# Altium PCB XUF208_Breakout.PcbDoc
Units mil, origin at the board's own origin, x right, y up, seen from the top; angles counter-clockwise.
Board outline 1259.84 x 1909.45 mil, 4 copper layers (Top Layer, Ground Layer, Power Layer, Bottom Layer), stack 61.85 mil thick; 56 components, 63 nets, 257 pads, 130 vias.
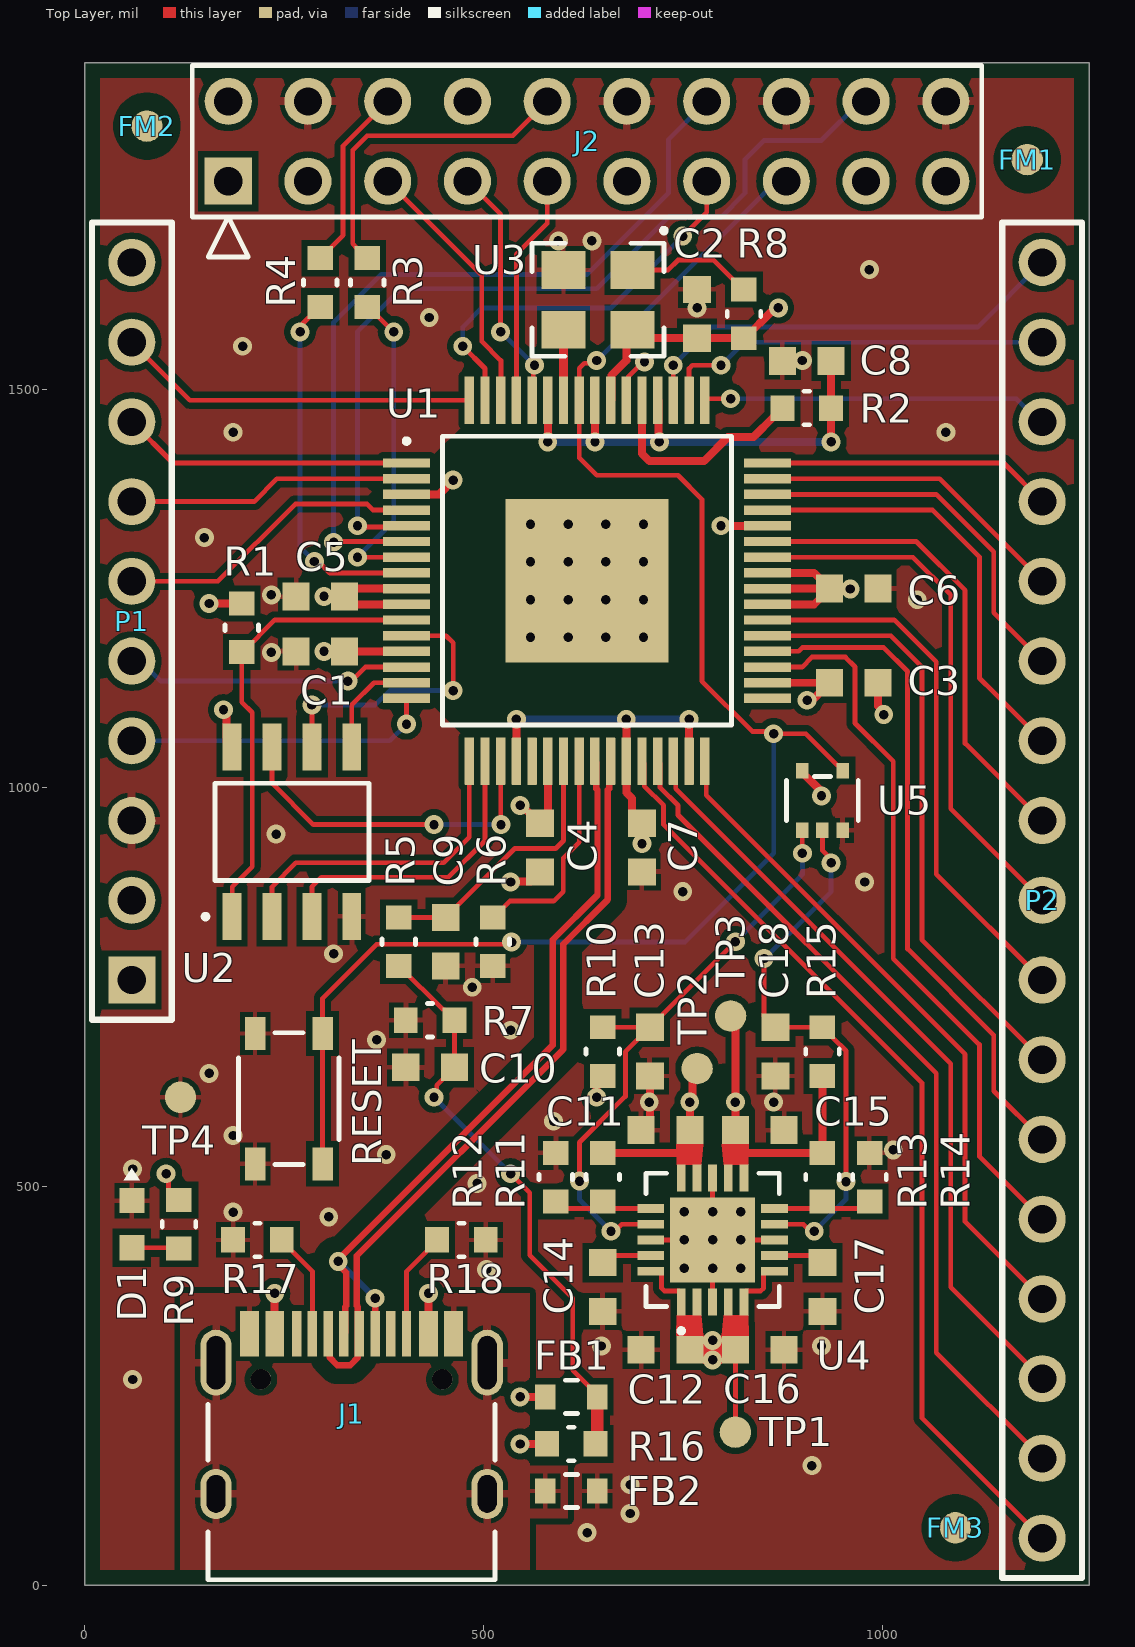
[diagram p0: Top Layer view]
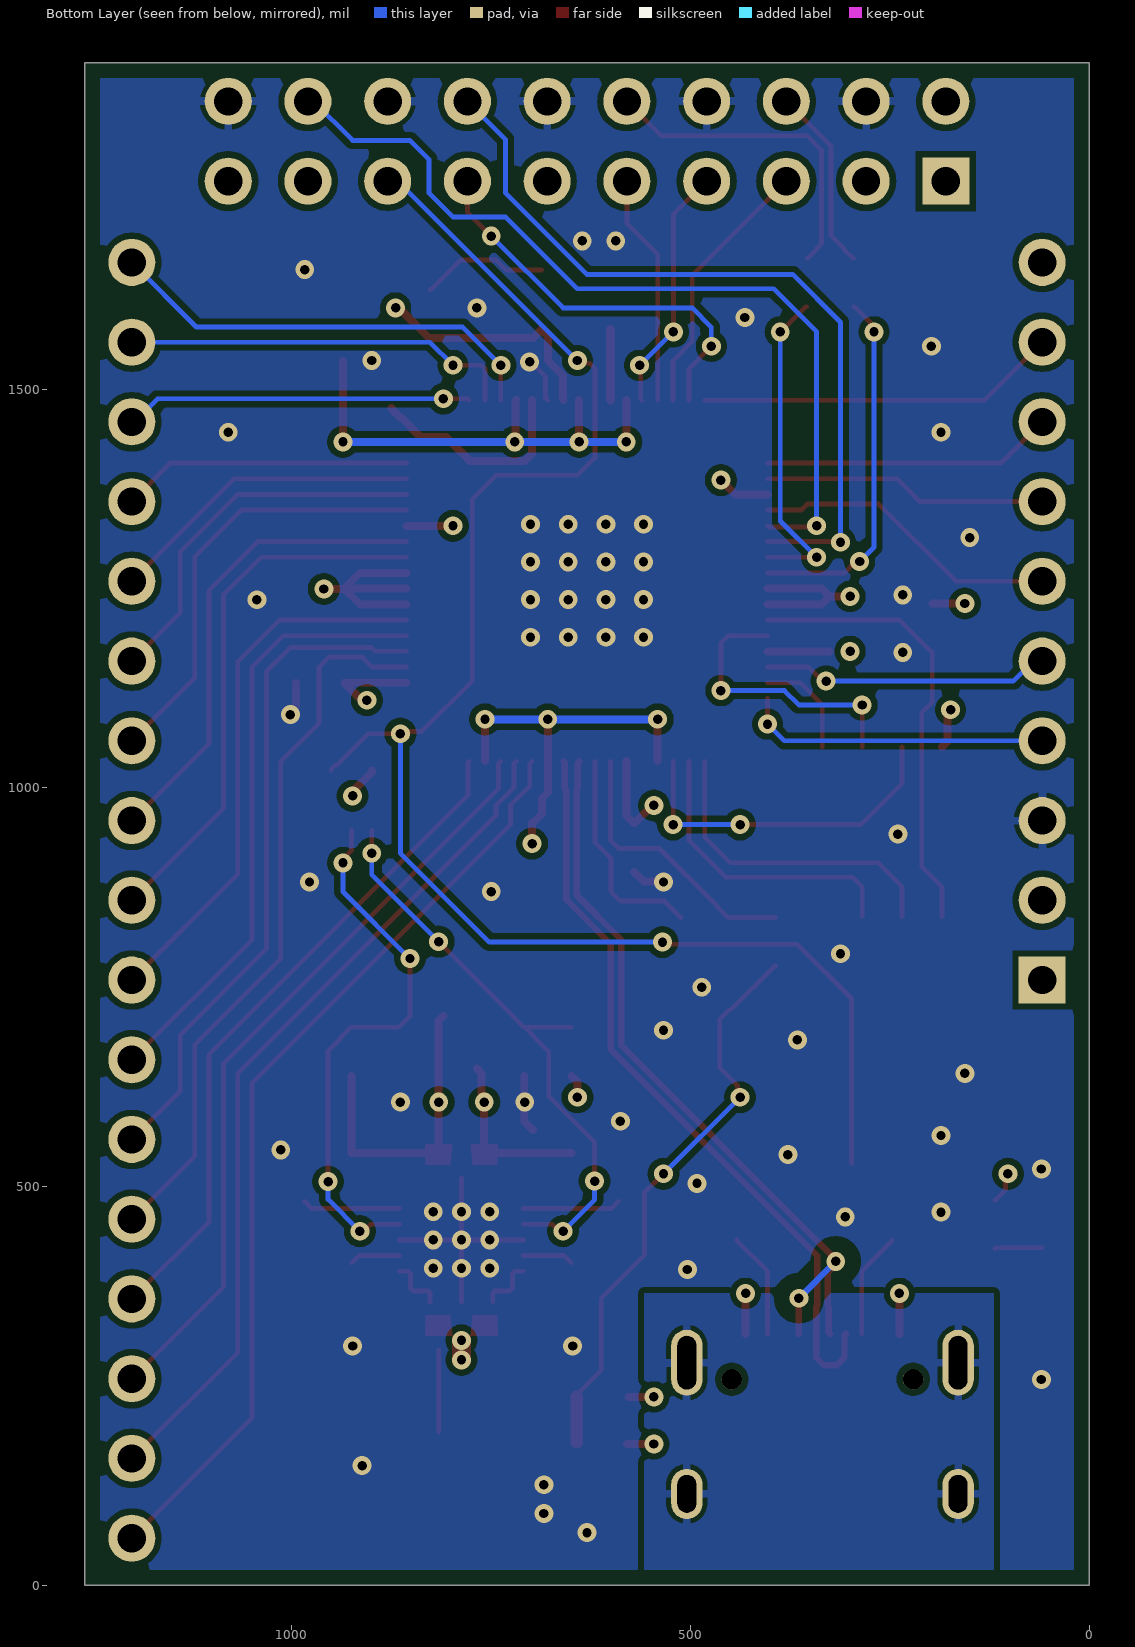
[diagram p1: Bottom Layer view, seen from below]
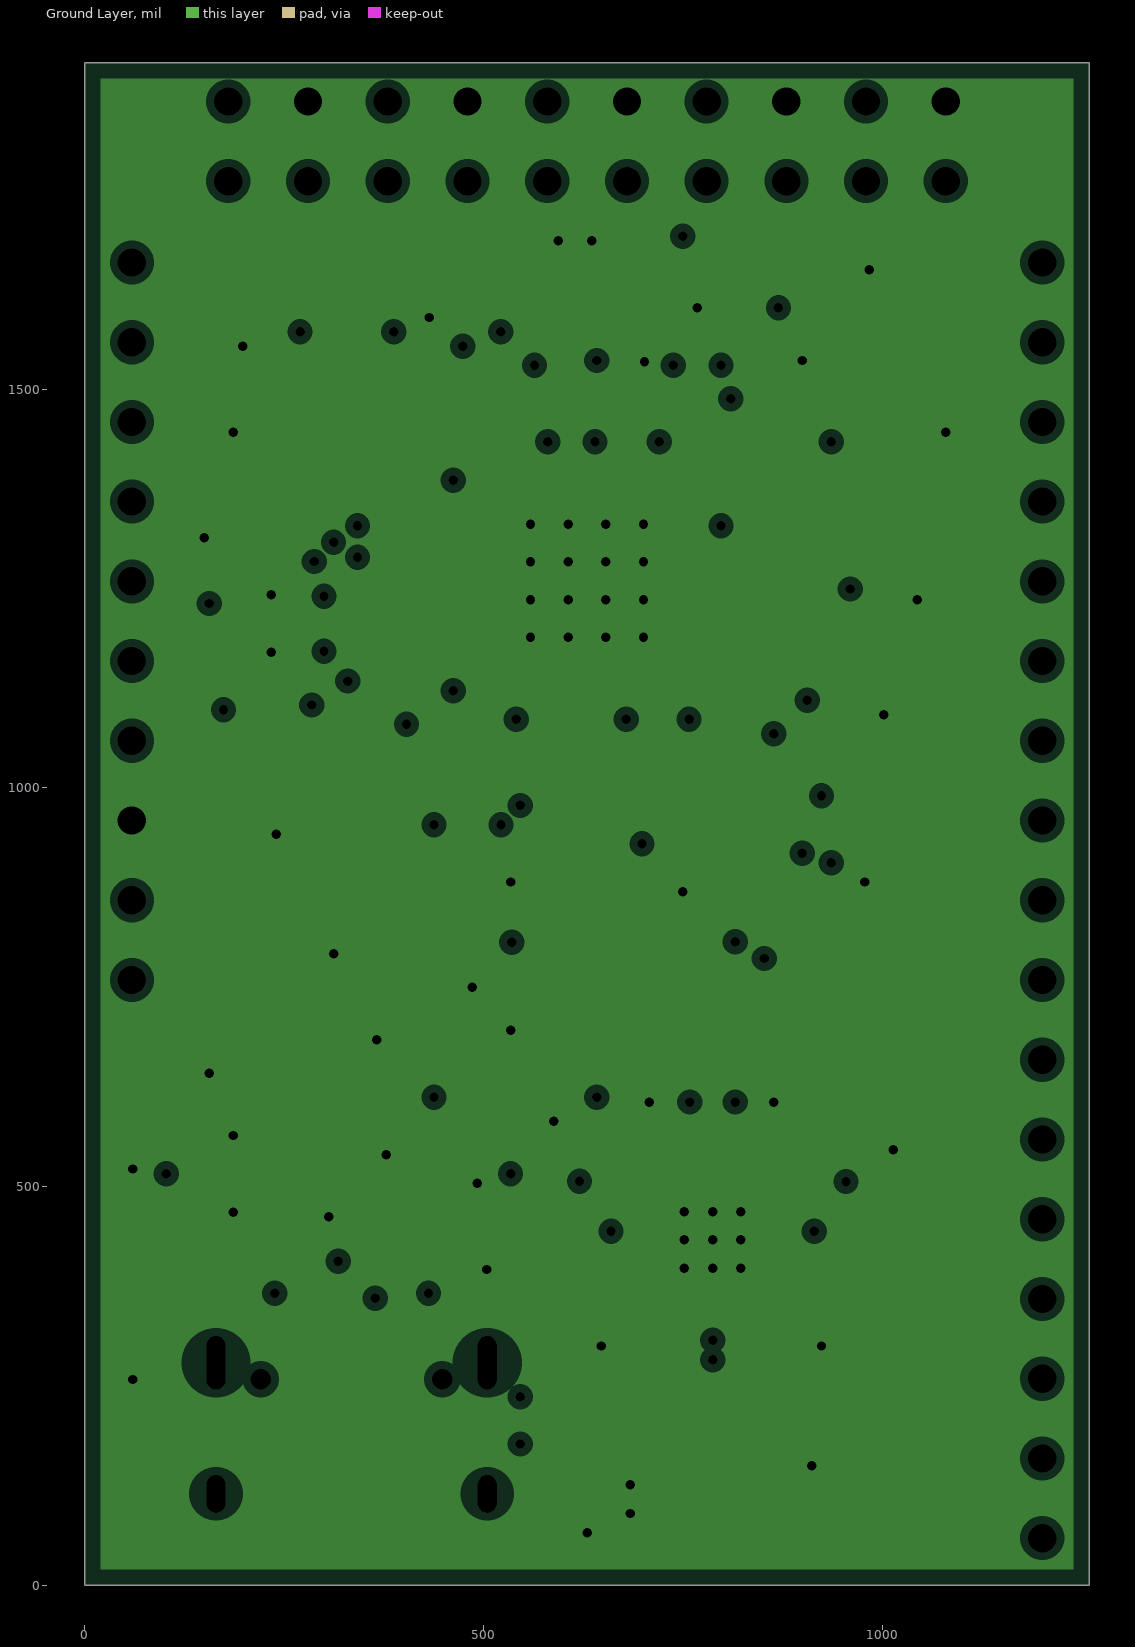
[diagram p2: Ground Layer, clearances drawn from the general rule]
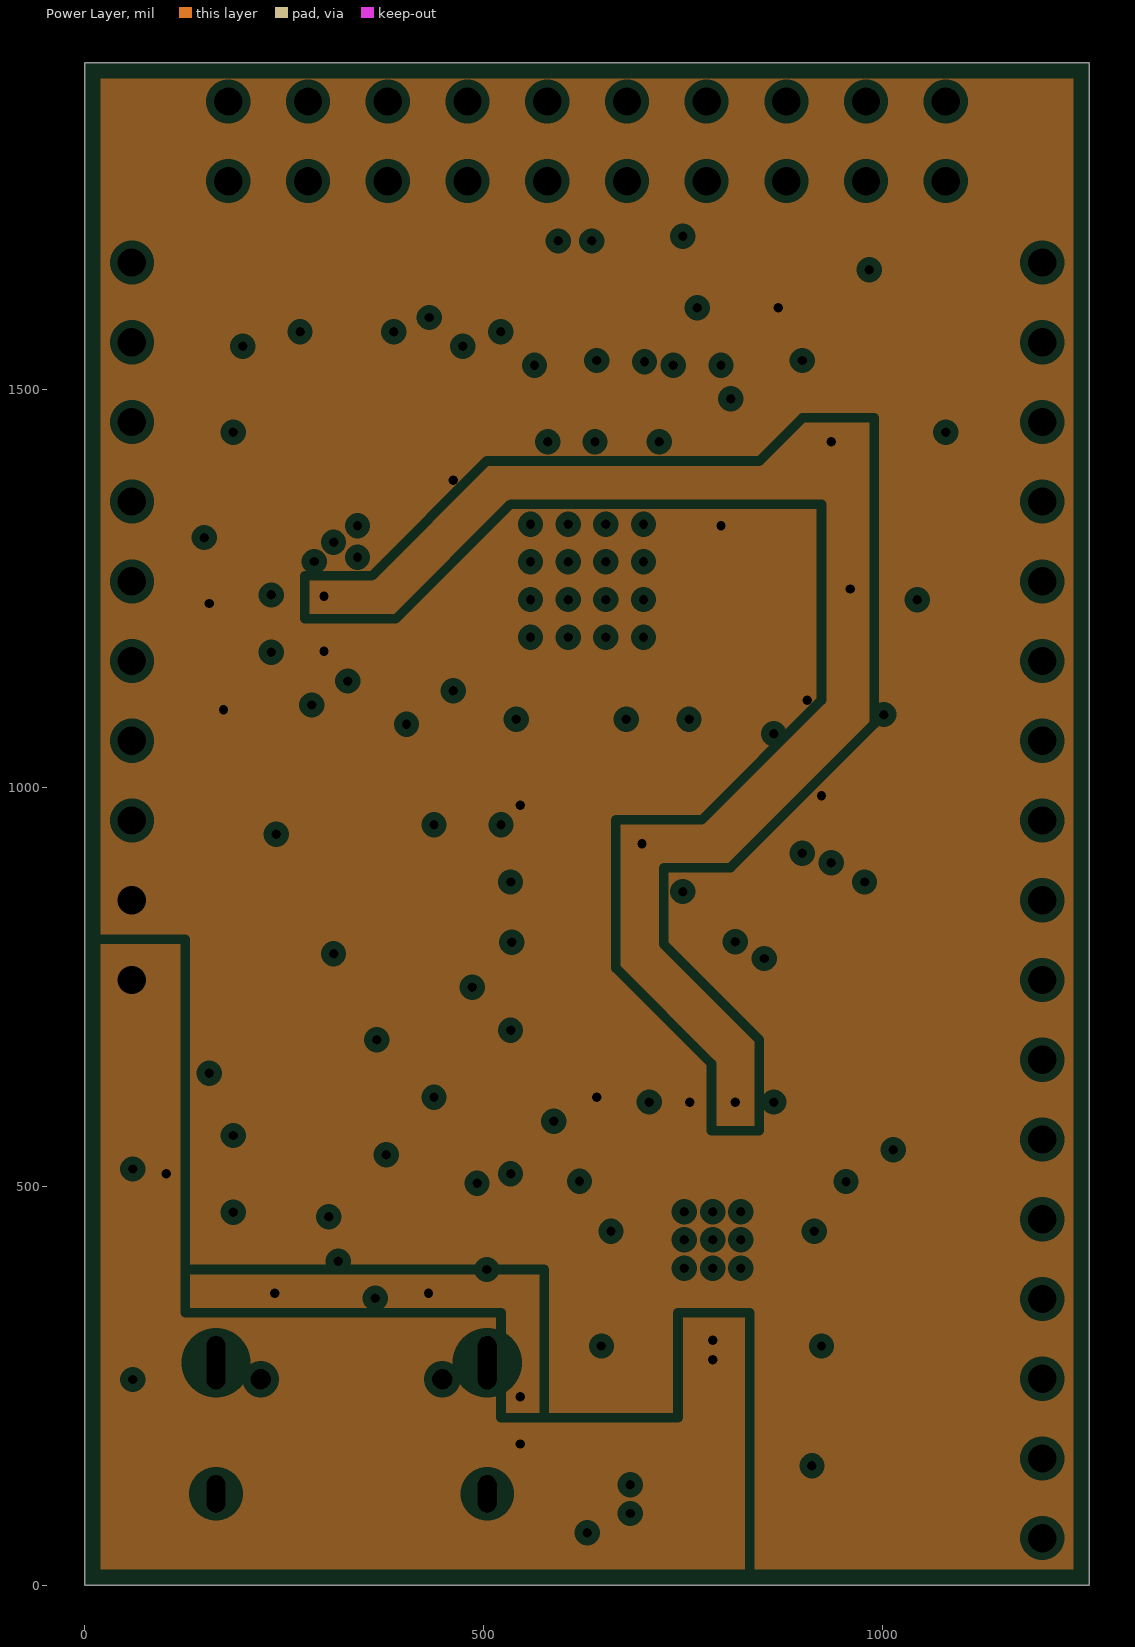
[diagram p3: Power Layer, clearances drawn from the general rule]
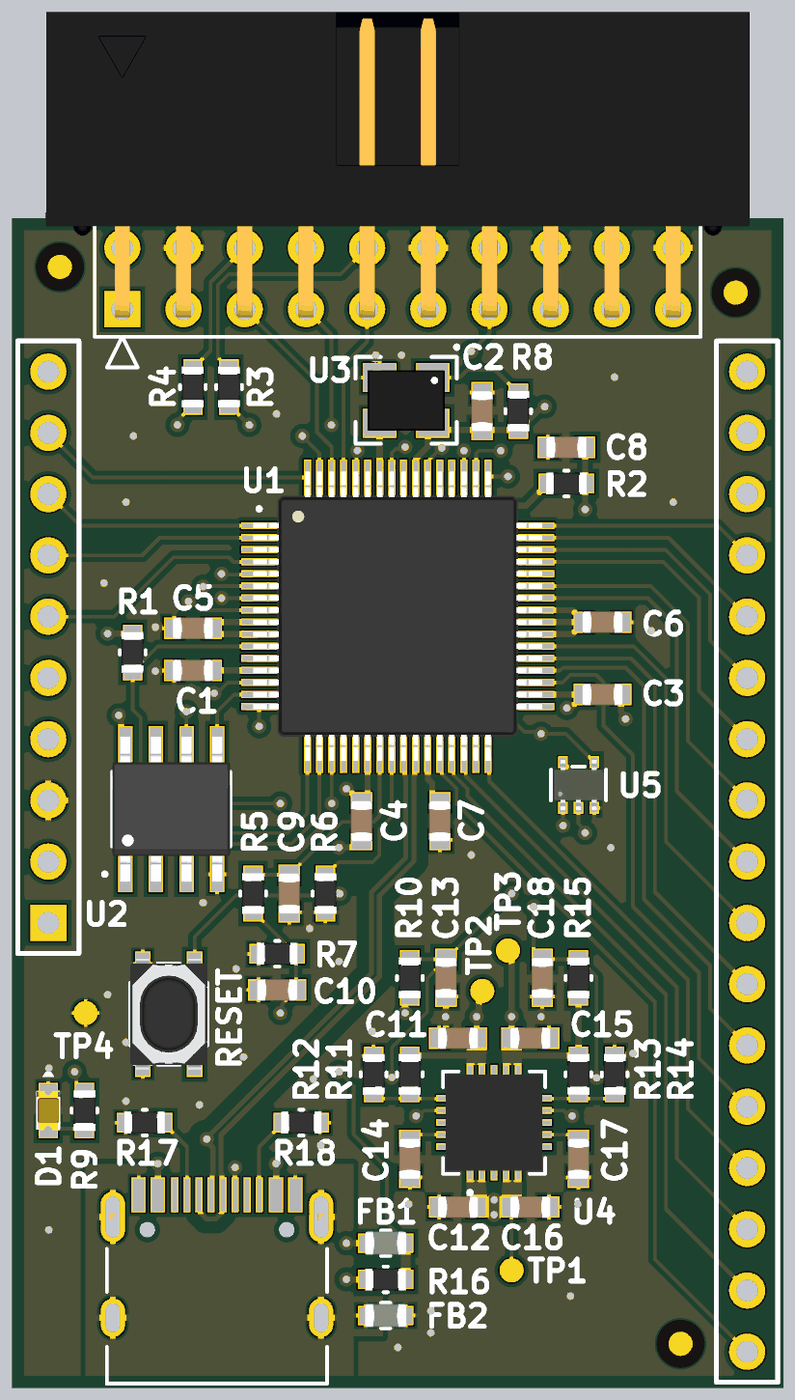
[diagram p4: 3D render of the assembled board from above, using the file's embedded part models]

## Layer stack, top to bottom
Top Solder: solder mask 0.3937, Solder Resist, Dk 3.8
Top Layer: signal copper 1.378
Dielectric 2: prepreg 7.874, PP-022, Dk 4.6
Ground Layer: plane copper 0.7087, net GND
Dielectric 1: core 41.9291, Core-042, Dk 4.6
Power Layer: plane copper 0.7087, net (Multiple Nets)
Dielectric 3: prepreg 7.874, PP-022, Dk 4.6
Bottom Layer: signal copper 1.378
Bottom Solder: solder mask 0.3937, Solder Resist, Dk 3.8

## Board outline
0,0 1259.84,0 1259.84,1909.45 0,1909.45

## Design rules (kind name [scope] priority, off if disabled: settings)
Clearance "50Omhs Single-end Clearance" [InNet('24M_CLK')] p1: gap=6 ignorepadtopadclearanceinfootprint=FALSE except(4: Arc-Arc Arc-Track Track-Track; 5: Arc-SMDPad Arc-THPad Arc-Via Track-SMDPad Track-THPad Track-Via SMDPad-SMDPad SMDPad-THPad SMDPad-Via THPad-THPad THPad-Via Via-Via; 22: Arc-Fill Arc-Poly Arc-Region Track-Fill Track-Poly Track-Region Via-Fill Via-Poly Via-Region)
Clearance "USB DiffPairs Clearance" [InNetClass('USB')] p2: gap=6 ignorepadtopadclearanceinfootprint=FALSE except(4: Arc-Arc Arc-Track Track-Track; 5: Arc-SMDPad Arc-THPad Arc-Via Track-SMDPad Track-THPad Track-Via SMDPad-SMDPad SMDPad-THPad SMDPad-Via THPad-THPad THPad-Via Via-Via; 20: Arc-Fill Arc-Poly Arc-Region Track-Fill Track-Poly Track-Region Via-Fill Via-Poly Via-Region)
Clearance [All] p3: gap=8 ignorepadtopadclearanceinfootprint=FALSE except(4: Arc-Arc Arc-Track Track-Track; 5: Arc-SMDPad Arc-THPad Arc-Via Track-SMDPad Track-THPad Track-Via SMDPad-SMDPad SMDPad-THPad SMDPad-Via THPad-THPad THPad-Via Via-Via)
DiffPairsRouting "USB DiffPairs Routing" [InNetClass('USB')] p1: maxlimit=30 minlimit=5 mostfreqgap=5 toplayer_minwidth=8.1 toplayer_maxwidth=8.1 toplayer_prefwidth=8.1 bottomlayer_minwidth=8.1 bottomlayer_maxwidth=8.1 bottomlayer_prefwidth=8.1 maxuncoupledlength=15.75
HoleSize [All] p1: absolutevalues=TRUE maxlimit=248.03 minlimit=11.81 maxpercent=80.000 minpercent=20.000
HoleToHoleClearance [All] p1: gap=6 allowstackedmicrovias=TRUE
MinimumSolderMaskSliver [All] p1: minsoldermaskwidth=0
PasteMaskExpansion [All] p1: expansion=-1.97
PlaneClearance [All] p1: clearance=10
PlaneConnect [All] p1: planeconnectstyle=Direct reliefexpansion=20 reliefentries=4 reliefconductorwidth=10 reliefairgap=10
PolygonConnect [All] p1: thpad.connectstyle=Relief thpad.reliefconductorwidth=10 thpad.reliefentries=4 thpad.polygonreliefangle="90 Angle" thpad.airgapwidth=6 smdpad.connectstyle=Relief smdpad.reliefconductorwidth=6 smdpad.reliefentries=4 smdpad.polygonreliefangle="90 Angle" smdpad.airgapwidth=6 via.connectstyle=Direct via.reliefconductorwidth=10 via.reliefentries=4 via.polygonreliefangle="90 Angle" via.airgapwidth=7.87
RoutingVias [All] p1: holewidth=15.75 width=31.5 viastyle="Through Hole" minholewidth=11.81 minwidth=23.62 maxholewidth=248.03 maxwidth=314.96
SilkToSilkClearance [All] p1: silktosilkclearance=0
SilkToSolderMaskClearance [IsPad] p1: minsilkscreentomaskgap=0 clearancetoexposedcopper=TRUE
SolderMaskExpansion "Via SolderMaskExpansion" [IsVia] p1: expansion=4 istentingtop=TRUE
SolderMaskExpansion [All] p2: expansion=2.76 istentingtop=FALSE
Width "50Omhs Single-end Width" [InNet('24M_CLK')] p1: maxlimit=12 minlimit=11 preferedwidth=11.55
Width [All] p2: maxlimit=60 minlimit=4 preferedwidth=6
21 further rules are at their usual default settings.

## Classes and differential pairs
differential pair class USB_DIFFPAIR: USB
net class USB: USB_N USB_P
net class CLK: 24M_CLK
component class U_xmos: C1 C2 C3 C4 C5 C6 C7 C8 C9 C10 R1 R2 R3 R4 R5 R6 R7 R8 U1 U2 U3
component class U_power: C11 C12 C13 C14 C15 C16 C17 C18 D1 R9 R10 R11 R12 R13 R14 R15 TP1 TP2 TP3 TP4 U4 U5
component class connector: FB1 FB2 FM1 FM2 FM3 J1 J2 P1 P2 R16 R17 R18 RESET
differential pair USB: +USB_P -USB_N

## Components (designator, comment, footprint, x,y, rotation, side; value= is the part's Value field where it differs from the comment)
C1 "MLCC" CAP_0603 295.28,1171.26 r0 top locked value=100nF
C2 "MLCC" CAP_0603 767.72,1594.49 r270 top locked value=100nF
C3 "MLCC" CAP_0603 964.57,1131.89 r180 top locked value=100nF
C4 "MLCC" CAP_0603 570.87,925.2 r90 top locked value=100nF
C5 "MLCC" CAP_0603 295.28,1240.16 r0 top locked value=100nF
C6 "MLCC" CAP_0603 964.57,1250 r180 top locked value=100nF
C7 "MLCC" CAP_0603 698.82,925.2 r90 top locked value=100nF
C8 "MLCC" CAP_0603 905.51,1535.43 r0 top locked value=100nF
C9 "MLCC" CAP_0603 452.76,807.09 r90 top locked value=100nF
C10 "MLCC" CAP_0603 433.07,649.61 r180 top locked value=1uF
C11 "MLCC" CAP_0603 728.35,570.87 r0 top locked value=10uF
C12 "MLCC" CAP_0603 728.35,295.28 r0 top locked value=10uF
C13 "MLCC" CAP_0603 708.66,669.29 r90 top locked value=100nF
C14 "MLCC" CAP_0603 649.61,374.02 r270 top locked value=10nF
C15 "MLCC" CAP_0603 846.46,570.87 r180 top locked value=10uF
C16 "MLCC" CAP_0603 846.46,295.28 r180 top locked value=10uF
C17 "MLCC" CAP_0603 925.2,374.02 r270 top locked value=10nF
C18 "MLCC" CAP_0603 866.14,669.29 r90 top locked value=100nF
D1 "LED" 0603_RED 59.06,452.76 r90 top locked
FB1 "Ferrite" IND_1608 610.24,236.22 r0 top locked value=10mH
FB2 "Ferrite" IND_1608 610.24,118.11 r0 top locked value=10mH
FM1 "FIDUCIAL" FIDUCIAL_10_20 1182,1788 r0 top locked
FM2 "FIDUCIAL" FIDUCIAL_10_20 78,1830 r90 top locked
FM3 "FIDUCIAL" FIDUCIAL_10_20 1092,72 r90 top locked
J1 "USB C RECEPTACLE(1)" "USB C RECEPTACLE 2(1)" 334.65,196.85 r0 top locked
J2 "DC3-20P" "IDC-20 (1)" 629.92,1811.02 r180 top locked
P1 "Header 10" HDR1X10 59.06,759.06 r90 top locked
P2 "Header 17" HDR1X17 1200.79,1659.06 r270 top locked
R1 "RES" RC0603N 196.85,1200.79 r90 top locked value=1K
R2 "RES" RC0603N 905.51,1476.38 r0 top locked value=4.7
R3 "RES" RC0603N 354.33,1633.86 r90 top locked value=33
R4 "RES" RC0603N 295.28,1633.86 r90 top locked value=33
R5 "RES" RC0603N 393.7,807.09 r270 top locked value=10K
R6 "RES" RC0603N 511.81,807.09 r270 top locked value=43.2
R7 "RES" RC0603N 433.07,708.66 r0 top locked value=47K
R8 "RES" RC0603N 826.77,1594.49 r270 top locked value=10K
R9 "RES" RC0603N 118.11,452.76 r90 top locked value=220
R10 "RES" RC0603N 649.61,669.29 r90 top locked value=10K
R11 "RES" RC0603N 649.61,511.81 r90 top locked value=33.2K
R12 "RES" RC0603N 590.55,511.81 r270 top locked value=10.7K
R13 "RES" RC0603N 925.2,511.81 r90 top locked value=2.55K
R14 "RES" RC0603N 984.25,511.81 r270 top locked value=10.2K
R15 "RES" RC0603N 925.2,669.29 r90 top locked value=10K
R16 "RES" RC0603N 610.24,177.17 r180 top locked value=0
R17 "RES" RC0603N 216.54,433.07 r0 top locked value=5.1K
R18 "RES" RC0603N 472.44,433.07 r180 top locked value=5.1K
RESET "Tact Switch SPST" TS_SPST_W4.2XD3.2 255.91,610.24 r270 top locked (schematic designator S1)
TP1 "TestPoint" TESTPOINT(1) 816,192 r90 top locked
TP2 "TestPoint" TESTPOINT(1) 768,648 r90 top locked
TP3 "TestPoint" TESTPOINT(1) 810,714 r90 top locked
TP4 "TestPoint" TESTPOINT(1) 120,612 r180 top locked
U1 "XUF208-256-TQ64" TQ64 629.92,1259.84 r0 top locked
U2 "W25Q16JV" SOIC-8_150MIL 259.84,944.88 r90 top locked value=Value
U3 "XO" QFN_3225_4P 643.7,1612.2 r180 top locked
U4 "TPS7A87" RTJ20 787.4,433.07 r90 top locked value=Value
U5 "MC74VHC1G08" SC-88A 925.2,984.25 r90 top locked

## Footprints (in the part's own frame and the unit in brackets; to place one, negate y for a bottom-side part, rotate by r counter-clockwise, add the part's x,y. Pads: shape width x height; smd on the part's side, far side on the other; paste and mask are expansions set on the pad)
0603_RED [mm]
  rect 0.8x0.8 smd: 1(-0.75,0) 2(0.75,0)
  silkscreen extent 1.4,-0.25 1.78,0.25, body extent -0.81,-0.5 0.81,0.5, height 0.88
CAP_0603 [mil]
  rect 34x35 smd: 1(-30.5,0) 2(30.5,0)
  body extent -33,-18 33,18, height 35
FIDUCIAL_10_20 [mm]
  round 1 smd paste-1 mask+0.5: 1(0,0)
HDR1X10 [mm] "Connector; Header; 10 Position"
  rect 1.5x1.5 hole 0.9: 1(0,0)
  round 1.5 hole 0.9: 2(2.54,0) 3(5.08,0) 4(7.62,0) 5(10.16,0) 6(12.7,0) 7(15.24,0) 8(17.78,0) 9(20.32,0) 10(22.86,0)
  silkscreen extent -1.27,-1.27 24.13,1.27
HDR1X17 [mm] "Connector; Header; 17 Position"
  round 1.5 hole 0.9: 1(0,0) 2(2.54,0) 3(5.08,0) 4(7.62,0) 5(10.16,0) 6(12.7,0) 7(15.24,0) 8(17.78,0) 9(20.32,0) 10(22.86,0) 11(25.4,0) 12(27.94,0) 13(30.48,0) 14(33.02,0) 15(35.56,0) 16(38.1,0) 17(40.64,0)
  silkscreen extent -1.27,-1.27 41.91,1.27
"IDC-20 (1)" [mm]
  rect 1.5x1.5 hole 0.9: 1(11.43,1.27)
  round 1.5 hole 0.9: 2(11.43,-1.27) 3(8.89,1.27) 4(8.89,-1.27) 5(6.35,1.27) 6(6.35,-1.27) 7(3.81,1.27) 8(3.81,-1.27) 9(1.27,1.27) 10(1.27,-1.27) 11(-1.27,1.27) 12(-1.27,-1.27) 13(-3.81,1.27) 14(-3.81,-1.27) 15(-6.35,1.27) 16(-6.35,-1.27) 17(-8.89,1.27) 18(-8.89,-1.27) 19(-11.43,1.27) 20(-11.43,-1.27)
  silkscreen extent -12.57,-2.41 12.57,3.68, body extent -14.61,-11.04 14.6,1.61, height 9.47
IND_1608 [mm]
  rect 0.656x0.8 smd: 1(-0.828,0) 2(0.828,0)
  silkscreen extent -0.19,-0.53 0.19,0.53, body extent -0.87,-0.47 0.88,0.48, height 0.95
QFN_3225_4P [mm]
  rect 1.4x1.2 smd: 1(-1.1,-0.95) 2(1.1,-0.95) 3(1.1,0.95) 4(-1.1,0.95)
  silkscreen extent -2.18,-2.28 2.1,1.8, body extent -1.6,-1.25 1.6,1.25, height 0.8
RC0603N [mil]
  rect 30x32 smd: 1(-30.5,0) 2(30.5,0)
  silkscreen extent -3,-21 3,21, body extent -33,-18 33,18, height 22
RTJ20 [mm]
  rect 0.85x0.28 smd paste-0.05 mask+0.07: 1(-1.975,1) 2(-1.975,0.5) 3(-1.975,0) 4(-1.975,-0.5) 5(-1.975,-1) 11(1.975,-1) 12(1.975,-0.5) 13(1.975,0) 14(1.975,0.5) 15(1.975,1)
  rect 0.28x0.85 smd paste-0.05 mask+0.07: 6(-1,-1.975) 7(-0.5,-1.975) 8(0,-1.975) 9(0.5,-1.975) 10(1,-1.975) 16(1,1.975) 17(0.5,1.975) 18(0,1.975) 19(-0.5,1.975) 20(-1,1.975)
  rect 2.7x2.7 smd paste-3.1 mask+0.07: 21(0,0)
  silkscreen extent -2.97,-2.12 2.12,2.12, body extent -2,-2 2,2, height 0.8
SC-88A [mm]
  rect 0.5x0.4 smd mask+0.05: 1(-0.95,0.65) 2(-0.95,0) 3(-0.95,-0.65) 4(0.95,-0.65) 5(0.95,0.65)
  silkscreen extent -0.64,-1.14 0.76,1.14, body extent -1.05,-1 1.05,1, height 1.01
SOIC-8_150MIL [mm] "SOIC, 8-Leads, Body 4.85x3.90mm, Pitch 1.27mm, IPC Medium Density"
  rect 1.5x0.6 smd: 1(-2.7,1.905) 2(-2.7,0.635) 3(-2.7,-0.635) 4(-2.7,-1.905) 5(2.7,-1.905) 6(2.7,-0.635) 7(2.7,0.635) 8(2.7,1.905)
  silkscreen extent -2.78,-2.45 1.55,2.83, body extent -3,-2.45 3,2.45, height 1.6
TESTPOINT(1) [mm]
  round 1 smd paste-0.5: 1(0,0)
TQ64 [mm] "TSQFP, 64-Leads, Body 10.00x10.00mm, Pitch 0.50mm, Thermal Pad 5.48x5.48mm, IPC Medium Density"
  rrect5% 1.5x0.3 smd mask+0.07: 1(-5.75,3.75) 2(-5.75,3.25) 3(-5.75,2.75) 4(-5.75,2.25) 5(-5.75,1.75) 6(-5.75,1.25) 7(-5.75,0.75) 8(-5.75,0.25) 9(-5.75,-0.25) 10(-5.75,-0.75) 11(-5.75,-1.25) 12(-5.75,-1.75) 13(-5.75,-2.25) 14(-5.75,-2.75) 15(-5.75,-3.25) 16(-5.75,-3.75) 33(5.75,-3.75) 34(5.75,-3.25) 35(5.75,-2.75) 36(5.75,-2.25) 37(5.75,-1.75) 38(5.75,-1.25) 39(5.75,-0.75) 40(5.75,-0.25) 41(5.75,0.25) 42(5.75,0.75) 43(5.75,1.25) 44(5.75,1.75) 45(5.75,2.25) 46(5.75,2.75) 47(5.75,3.25) 48(5.75,3.75)
  rrect5% 0.3x1.5 smd mask+0.07: 17(-3.75,-5.75) 18(-3.25,-5.75) 19(-2.75,-5.75) 20(-2.25,-5.75) 21(-1.75,-5.75) 22(-1.25,-5.75) 23(-0.75,-5.75) 24(-0.25,-5.75) 25(0.25,-5.75) 26(0.75,-5.75) 27(1.25,-5.75) 28(1.75,-5.75) 29(2.25,-5.75) 30(2.75,-5.75) 31(3.25,-5.75) 32(3.75,-5.75) 49(3.75,5.75) 50(3.25,5.75) 51(2.75,5.75) 52(2.25,5.75) 53(1.75,5.75) 54(1.25,5.75) 55(0.75,5.75) 56(0.25,5.75) 57(-0.25,5.75) 58(-0.75,5.75) 59(-1.25,5.75) 60(-1.75,5.75) 61(-2.25,5.75) 62(-2.75,5.75) 63(-3.25,5.75) 64(-3.75,5.75)
  rect 5.2x5.2 smd paste-999 mask+0.07: 65(0,0)
  silkscreen extent -5.83,-4.6 4.6,4.6, body extent -6,-6 6,6, height 1.1
TS_SPST_W4.2XD3.2 [mm]
  rect 1.05x0.65 smd: 1(-2.075,1.075) 1(2.075,1.075) 2(-2.075,-1.075) 2(2.075,-1.075)
  silkscreen extent -2.1,-1.6 2.1,1.6, body extent -2.3,-1.6 2.3,1.6, height 2.5
"USB C RECEPTACLE 2(1)" [mm] "USB 2.0"
  rect 0.6x1.45 smd: A1/B12(-3.25,3.005) A4/B9(-2.45,3.005) B1/A12(3.25,3.005) B4/A9(2.45,3.005)
  rect 0.3x1.45 smd: A5(-1.25,3.005) A6(-0.25,3.005) A7(0.25,3.005) A8(1.25,3.005) B5(1.75,3.005) B6(0.75,3.005) B7(-0.75,3.005) B8(-1.75,3.005)
  round 0.65 hole 0.65 unplated mask+0: None(-2.89,1.56) None(2.89,1.56)
  oval 1x2.1 hole 0.6 slot 1.7 at 90 deg: SH1(-4.32,2.09) SH2(4.32,2.09)
  oval 1x1.6 hole 0.6 slot 1.2 at 90 deg: SH3(-4.32,-2.09) SH4(4.32,-2.09)
  silkscreen extent -4.57,-4.83 4.57,0.76

## Part data
C1 C2 C3 C4 C5 C6 C7 C8 C9 C10 C11 C12 C13 C14 C15 C16 C17 C18: "Multilayer Ceramic Capacitors", Tolerance=10%, VoltageRatingDC=5V
D1: "LED Emitters", ForwardVoltage=2V
FB1 FB2: "Ferrite Beads", MaximumDCCurrent=1A, Impedance=33Ohms
FM1 FM2 FM3: "Fiducial, dot"
J1: "Universal Serial Bus (USB) I/O Receptacle, Type C, 2.0", Built_By="Gordon Mak"
J2: "20-Pin Shrouded Header (IDC) Right Angle", Built_By="Gordon Mak"
P1: "Header, 10-Pin", LatestRevisionDate=17-Jul-2002, LatestRevisionNote="Re-released for DXP Platform.", Publisher="Altium Limited"
P2: "Header, 17-Pin", LatestRevisionDate=17-Jul-2002, LatestRevisionNote="Re-released for DXP Platform.", Publisher="Altium Limited"
R1 R2 R3 R4 R5 R6 R7 R8 R9 R10 R11 R12 R13 R14 R15 R16 R17 R18: "Chip Resistors", PowerRating=0.25W
RESET: "Switch"
TP1 TP2 TP3 TP4: "Test Point"
U1: "xCORE Multicore Microcontroller, xCORE-200, USB, Single Tile, 8 Cores, 500MHz, 64TQFP", Manufacturer=XMOS, Manufacturer Part Number=XUF208-256-TQ64
U2: "3V 16M-BIT SERIAL FLASH MEMORY WITH DUAL/QUAD SPI", Manufacturer_Part_Number=W25Q16JVXXXX, Built_By=EMA_Anthony, Copyright="Copyright (C) 2018 Accelerated Designs. All rights reserved", RefDes=RefDes, Type=DEV, Vendor=Winbond
U3: "SiTime Ultra Performance Oscillator", Frequency="24 MHz", Manufacturer=SiTime, ComponentLink1Description="Manufacturer URL", ComponentLink1URL=https://www.sitime.com, ComponentLink2Description=Datasheet, ComponentLink2URL=https://www.sitime.com/datasheet/SiT8208
U4: "TPS7A87 Dual, 500-mA, Low-Noise (3.8 ��VRMS), LDO Voltage Regulator", Manufacturer="Texas Instruments", Manufacturer_Part_Number=TPS7A8701RTJR, Built_By=Texas_Instrument_Team, Copyright="Copyright (C) 2018 Accelerated Designs. All rights reserved", RefDes=RefDes, Type=DEV
U5: "Single 2-Input AND Gate", SupplyVoltageMax=5.5V, SupplyVoltageMin=2V

## Via types
v1: diameter 23.62, hole 11.81, Top Layer to Bottom Layer, tented both sides, 130 vias

## Nets (pads, with @x,y where several pads share a name; then routed paths per layer and width w, separated by ;. In a path a pad name is that pad's centre, name@x,y a point inside that pad or via, vN(x,y) a via of type N, cw(c..) or ccw(c..) an arc to the next point about the centre after c; other vN are vias at no path point)
1V0A: C5.2 C6.2 C7.2 C8.2 C15.2 R2.2 R13.2 R15.1 TP3.1 U1.9 U1.10 U1.20 U1.27 U1.31 U1.39 U1.40 U1.41 U1.52 U1.56 U1.59 U4.11 U4.12 | length 1946
  Top Layer w10: v1(300,1240.16) C5.2 ; U1.10 335.62,1230.31 C5.2 ; U1.9 335.62,1250 C5.2 ; U1.20 v1(541.34,1086) ; v1(580.71,1434) U1.59 ; U1.56 639.83,1486.16 639.83,1434.06 v1(639.89,1434) ; v1(679.13,1086) U1.27 679.13,994.09 686.32,986.91 686.32,967.7 698.32,955.7 C7.2 v1(698.82,930.12) ; U1.52 719.41,1485.31 719.41,1435.22 v1(720.63,1434) ; U1.31 v1(757.87,1086) ; TP3.1 816,708 v1(815.96,606) v1(815.96,606) C15.2 815.96,542.31 R13.2 R15.1 ; U1.39 914.88,1230.31 934.07,1249.5 C6.2 ; U1.40 C6.2 ; U1.41 914.88,1269.69 934.07,1250.5 C6.2 ; v1(936.01,1434) R2.2 C8.2 ; v1(960,1249.5) 934.57,1249.5 C6.2
  Bottom Layer w10: v1(541.34,1086) v1(679.13,1086) v1(757.87,1086) ; v1(580.71,1434) v1(936.01,1434)
3V3A: C1.2 C2.2 C3.2 C4.2 C11.2 P1.2 R1.2 R8.2 R10.1 R11.2 TP2.1 U1.3 U1.13 U1.22 U1.34 U1.44 U1.55 U2.8 U3.4 U4.14 U4.15 U5.5 | length 1118.9
  Top Layer w10: v1(156,1231.29) R1.2 ; v1(174,1098) 174,1094.31 178.03,1090.28 178.03,1057.99 U2.8 ; C1.2 U1.13 ; U1.3 444.11,1368.11 v1(462,1386) ; v1(546,978) 548.06,978 570.37,955.7 C4.2 580.71,965.54 U1.22 ; v1(642,612) 642,631.18 R10.1 ; R11.2 758.85,542.31 C11.2 v1(758.85,606) 762.22,609.37 762.22,642.22 TP2.1 ; U1.55 660.35,1487.13 660.35,1517.22 679.13,1536 679.13,1566.93 U3.4 697.82,1563.99 C2.2 R8.2 827.77,1563.99 863.18,1599.39 867.39,1599.39 v1(870,1602) ; v1(798,1328.74) U1.44 ; U1.34 C3.2 934.07,1131.39 915.28,1112.61 908.61,1112.61 v1(906,1110) ; U5.5 899.61,1019.69 921.39,997.9 921.39,992.61 v1(924,990)
  other v1: 300,1171.26
5V: C12.2 C16.2 P1.1 R9.2 R16.2 TP1.1 U4.1 U4.2 U4.4 U4.5 U4.6 U4.20 | length 320.6
  Top Layer w6: v1(102,516) 105.11,512.89 105.11,495.26 117.11,483.26 R9.2 ; U4.20 720.87,393.7 723.38,391.19 723.38,372.56 726.89,369.05 745.52,369.05 748.03,366.54 U4.1 ; C16.2 C16.2 TP1.1 ; U4.5 826.77,366.54 829.28,369.05 847.91,369.05 851.43,372.56 851.43,391.19 853.94,393.7 U4.6
  Top Layer w10: v1(546,177.17) R16.2
  other v1: 787.4,282.68 787.4,307.09
24M_CLK: U1.58 U3.3 | length 88.6
  Top Layer w11: U1.58 U3.3
GND: C1.1 C2.1 C3.1 C4.1 C5.1 C6.1 C7.1 C8.1 C9.1 C10.2 C11.1 C12.1 C13.1 C14.2 C15.1 C16.1 C17.2 C18.1 D1.2 FB2.2 J2.4 J2.8 J2.12 J2.16 J2.20 P1.3 R6.2 R7.1 R12.1 R14.1 R17.1 R18.1 RESET.2 TP4.1 U1.54 U1.65 U2.4 U3.2 U4.3 U4.8 U4.13 U4.18 U4.21 U5.3 | length 526.9
  Top Layer w6: U1.54 682.04,1489.13 682.04,1516.01 700.39,1534.37 v1(702,1534.37) ; U4.18 v1(751.97,433.07) v1(787.4,433.07) ; U4.3 v1(787.4,397.64) v1(787.4,433.07) ; U4.13 v1(787.4,468.5) v1(787.4,433.07) ; U4.8 v1(822.83,433.07) v1(787.4,433.07)
  Top Layer w10: v1(534,882) 534.7,882.7 558.87,882.7 C4.1 ; C11.1 708.66,581.68 C13.1 ; C3.1 995.07,1102.62 1002,1095.69 v1(1002,1092)
  other v1: 630,66 684,90 684,126 912,150 60,258 648,300 924,300 504,396 751.97,397.64 822.83,397.64 306,462 186,468 751.97,468.5 822.83,468.5 492,504 60,522 378,540 1014,546 186,564 588,582 708,606 864,606 156,642 366,684 534,696 486,750 312,792 750,870 978,882 240,942 234,1170 559.06,1188.98 606.3,1188.98 653.54,1188.98 700.79,1188.98 559.06,1236.22 606.3,1236.22 653.54,1236.22 700.79,1236.22 1044,1236 234,1242 559.06,1283.46 606.3,1283.46 653.54,1283.46 700.79,1283.46 150,1314 559.06,1330.71 606.3,1330.71 653.54,1330.71 700.79,1330.71 186,1446 1080,1446 900,1536 198,1554 432,1590 768,1602 984,1650 594,1686 636,1686
NetC9_2: C9.2 R5.1 U1.23 | length 346.4
  Top Layer w6: R5.1 C9.2 453.26,837.59 467.26,851.59 467.26,852.09 539.17,924 590.43,924 600.39,933.97 U1.23
NetC14_1: C14.1 U4.19 | length 63.7
  Top Layer w6: C14.1 658.48,413.39 U4.19
NetC17_1: C17.1 U4.7 | length 63.7
  Top Layer w6: U4.7 916.33,413.39 C17.1
NetD1_1: D1.1 R9.1 | length 59.5
  Top Layer w6: D1.1 117.14,423.23 R9.1
NetFB1_1: FB1.1 J1.A4/B9 J1.B4/A9 | length 133.3
  Top Layer w10: J1.A4/B9 v1(238.19,366) ; J1.B4/A9 v1(431.1,366) ; v1(546,236.22) FB1.1
NetFB2_1: FB2.1 J1.A1/B12 J1.B1/A12 J1.SH1 J1.SH2 J1.SH3 J1.SH4
NetJ1_A5: J1.A5 R17.2 | length 133.8
  Top Layer w6: R17.2 247.04,432.07 285.43,393.67 J1.A5
NetJ1_B5: J1.B5 R18.2 | length 133.8
  Top Layer w6: J1.B5 403.54,393.67 441.94,432.07 R18.2
NetR2_1: R2.1 U1.53 | length 275.1
  Top Layer w10: U1.53 698.82,1419.18 708,1410 776.82,1410 806.82,1440 838.63,1440 864.01,1465.38 865.01,1465.38 875.01,1475.38 R2.1
NetR3_1: R3.1 U1.7 | length 409.4
  Top Layer w6: v1(342,1289.24) 342.06,1289.31 U1.7 U1.7 ; R3.1 355.33,1603.36 386.69,1572 v1(387.52,1572)
  Bottom Layer w6: v1(342,1289.24) 387.52,1334.76 v1(387.52,1572)
NetR4_1: R4.1 U1.8 | length 459.6
  Top Layer w6: v1(270,1572) 273.37,1575.37 273.37,1582.45 294.28,1603.36 R4.1 ; v1(288,1284) 292.77,1284 307.34,1269.43 355.28,1269.43 355.53,1269.69 U1.8
  Bottom Layer w6: v1(270,1572) 270,1302 v1(288,1284)
NetR6_1: R6.1 U1.24 | length 273.4
  Top Layer w6: R6.1 512.81,837.59 533.22,858 588,858 600,870 600,912 620.08,932.08 U1.24
NetR8_1: R8.1 U3.1 | length 160.2
  Top Layer w6: U3.1 731.61,1649.61 744,1662 788.76,1662 825.77,1624.99 R8.1
NetR11_1: R11.1 R12.2 U4.16 | length 122.8
  Top Layer w6: R12.2 599.42,472.44 U4.16
NetR13_1: R13.1 R14.2 U4.10 | length 122.8
  Top Layer w6: U4.10 975.38,472.44 R14.2
PG1: C13.2 R10.2 U4.17 U5.1 | length 747.6
  Top Layer w6: v1(620.48,506.82) 620.48,555.5 678,613.02 678,669.13 694.16,685.29 694.16,685.79 C13.2@708.16,699.79 ; R10.2 C13.2@708.16,699.79 ; v1(660,444) 664.77,444 673.52,452.76 U4.17 ; v1(816,807.13) 723.16,714.29 723.16,713.79 709.16,699.79 C13.2 C13.2@708.16,699.79 ; U5.1 899.8,946.65 899.8,918.2 v1(900,918)
  Bottom Layer w6: v1(620.48,506.82) 620.48,483.52 v1(660,444) ; v1(816,807.13) 900,891.13 v1(900,918)
PG2: C18.2 R15.2 U4.9 U5.2 | length 689.7
  Top Layer w6: v1(852,786) 852,713.79 866,699.79 C18.2 R15.2 926.2,699.79 938.2,687.79 938.2,686.79 954.72,670.26 v1(954.72,506.29) ; U4.9 901.28,452.76 910.03,444 v1(914.8,444) ; U5.2 925.2,921.57 936,910.77 v1(936,906)
  Bottom Layer w6: v1(852,786) 936,870 v1(936,906) ; v1(914.8,444) 954.72,483.92 v1(954.72,506.29)
QSPI_CLK: U1.12 U2.6 | length 359.6
  Top Layer w6: U2.6 v1(284.84,1104) ; U1.12 453.06,1190.94 462,1182 v1(462,1122)
  Bottom Layer w6: v1(284.84,1104) 364.42,1104 382.42,1122 v1(462,1122)
QSPI_CS: R1.1 U1.11 U2.1 | length 571
  Top Layer w6: U2.1 184.84,876 210,901.16 210,1094.57 196.85,1107.72 R1.1 197.85,1170.29 238.19,1210.63 U1.11
QSPI_D0: U1.15 U2.5 | length 133.1
  Top Layer w6: U2.5 334.84,1104 362.73,1131.89 U1.15
QSPI_D1: U1.17 U2.2 | length 405.8
  Top Layer w6: U2.2 234.84,876 264.84,906 450,906 482.28,938.28 U1.17
QSPI_D2: U1.18 U2.3 | length 378.1
  Top Layer w6: U2.3 284.84,876 296.84,888 456,888 501.97,933.97 U1.18
QSPI_D3: U1.19 U2.7 | length 433.7
  Top Layer w6: U2.7 234.84,1005.6 286.44,954 v1(438,954) ; U1.19 521.83,1033.29 521.83,954.17 v1(522,954)
  Bottom Layer w6: v1(438,954) v1(522,954)
RST_N: J2.15 RESET.1 U1.57 U5.4 | length 2096
  Top Layer w6: RESET.1@298.23,528.54 298.23,691.93 298.23,736.23 366,804 532.68,804 v1(535.31,806.63) ; v1(642,1536) 638.63,1532.63 626.63,1532.63 620.08,1526.08 U1.57 620.08,1413.92 642,1392 744,1392 774,1362 774,1134 837.19,1070.81 861.19,1070.81 v1(864,1068) 904.44,1068 943.94,1028.5 945.91,1028.5 950.79,1023.62 U5.4
  Bottom Layer w6: v1(535.31,806.63) 752.63,806.63 864,918 v1(864,1068) ; v1(642,1536) 867.02,1761.02 J2.15
TCK: J2.9 U1.61 | length 290.8
  Top Layer w6: U1.61 541.34,1669.34 579.92,1707.92 J2.9
TDI: J2.5 U1.62 | length 333.8
  Top Layer w6: J2.5 498,1642.94 498,1560 522,1536 522,1486.57 U1.62
TDO: J2.13 U1.63 | length 508
  Top Layer w6: v1(474,1554) 501.97,1526.03 U1.63 ; v1(750,1692) 779.96,1721.96 779.96,1760.98 J2.13
  Bottom Layer w6: v1(474,1554) 474,1578 498,1602 660,1602 v1(750,1692)
TMS: J2.7 U1.60 | length 311.1
  Top Layer w6: J2.7 521.53,1719.42 v1(521.53,1572) ; U1.60 562.51,1487.71 562.51,1528.51 v1(564,1530)
  Bottom Layer w6: v1(521.53,1572) 521.76,1572 563.76,1530 v1(564,1530)
USB_N: J1.A7 J1.B7 U1.26 | length 954.1
  Top Layer w8.1: J1.B7 306.97,313.3 306.97,285.74 316.71,276 332.89,276 342.63,285.74 342.63,315.16 342.63,348.96 341.2,350.4 341.2,413.2 600,672 600,804 656.16,860.16 656.16,997.41 657.59,998.85 657.59,1031.61 U1.26
USB_P: J1.A6 J1.B6 U1.25 | length 970
  Top Layer w8.1: J1.A6 326.66,317.01 326.66,348.96 328.1,350.4 328.1,391.88 318,401.97 v1(318,406.17) 318,408.53 586.9,677.43 586.9,809.43 643.06,865.58 643.06,997.41 641.62,998.85 641.62,1031.61 U1.25 ; J1.B6 v1(364.17,360)
  Bottom Layer w8.1: v1(318,406.17) v1(364.17,360)
VBUS: C10.1 FB1.2 R5.2 R7.2 R16.1 | length 726.4
  Top Layer w6: R5.2 394.7,776.59 449.63,721.66 451.57,721.66 463.57,709.66 R7.2 C10.1 463.57,649.11 441.37,626.91 441.37,615.37 v1(438,612) ; v1(534,516) 558,492 558,414 612,360 612,269.89 642.83,239.06 FB1.2
  Top Layer w10: R16.1 R16.1@642.83,179.26
  Top Layer w16: R16.1@642.83,179.26 FB1.2
  Bottom Layer w6: v1(438,612) v1(534,516)
X0D00: P1.5 U1.14 | length 362.1
  Top Layer w6: v1(330,1134) 334.33,1134 351.9,1151.57 U1.14
  Bottom Layer w6: P1.5 70.17,1159.06 95.23,1134 v1(330,1134)
X0D11: P1.4 U1.16 | length 385.4
  Top Layer w6: v1(403.54,1080) U1.16
  Bottom Layer w6: P1.4 382.6,1059.06 v1(403.54,1080)
X0D14: P2.17 U1.28 | length 1182.3
  Top Layer w6: U1.28 701.72,1030.56 701.72,1002.28 726,978 726,954 1050,630 1050,209.84 P2.17
X0D15: P2.16 U1.29 | length 1074.2
  Top Layer w6: U1.29 721.41,1030.56 721.41,1000.59 744,978 744,966 1068,642 1068,291.84 P2.16
X0D16: P2.13 U1.35 | length 910
  Top Layer w6: U1.35 899.57,1151.57 912,1164 954,1164 966,1152 966,1081.24 1014,1033.24 1014,786 1122,678 1122,537.84 P2.13
X0D17: P2.12 U1.36 | length 846.9
  Top Layer w6: U1.36 895.26,1171.26 900,1176 1002,1176 1032,1146 1032,798 1140,690 1140,619.84 P2.12
X0D18: P2.11 U1.37 | length 765.2
  Top Layer w6: U1.37 1011.06,1190.94 1050,1152 1050,809.84 P2.11
X0D19: P2.10 U1.38 | length 687.4
  Top Layer w6: U1.38 1015.37,1210.63 1068,1158 1068,891.84 P2.10
X0D20: P2.15 U1.30 | length 966
  Top Layer w6: U1.30 741.09,1030.56 741.09,998.91 1086,654 1086,373.84 P2.15
X0D21: P2.14 U1.32 | length 849.7
  Top Layer w6: U1.32 779.33,1031.69 779.33,990.67 1104,666 1104,455.84 P2.14
X0D26: P2.8 U1.43 | length 602
  Top Layer w6: U1.43 1042.94,1309.06 1104,1248 1104,1055.84 P2.8
X0D27: P2.7 U1.45 | length 553.5
  Top Layer w6: U1.45 1063.57,1348.43 1122,1290 1122,1137.84 1140,1119.84 P2.7
X0D28: P2.5 U1.47 | length 397.9
  Top Layer w6: U1.47 1072.2,1387.8 1140,1320 1140,1319.84 P2.5
X0D29: P2.3 U1.49 | length 436
  Top Layer w6: U1.49 779.34,1488 v1(810,1488)
  Bottom Layer w6: v1(810,1488) 1168.5,1488 1197.45,1459.06 P2.3
X0D30: P2.2 U1.50 | length 496.3
  Top Layer w6: U1.50 757.87,1525.87 762,1530 v1(798,1530)
  Bottom Layer w6: v1(798,1530) 827.06,1559.06 P2.2
X0D31: P2.1 U1.51 | length 560.1
  Top Layer w6: v1(738,1530) 738.09,1529.91 738.09,1486.31 U1.51
  Bottom Layer w6: v1(738,1530) 786,1578 1119.73,1578 P2.1
X0D32: P2.6 U1.46 | length 475.7
  Top Layer w6: U1.46 1067.89,1368.11 1140,1296 1140,1219.84 P2.6
X0D33: P2.4 U1.48 | length 364.5
  Top Layer w6: U1.48 1152.36,1407.48 P2.4
X0D35: P2.9 U1.42 | length 679.8
  Top Layer w6: U1.42 1038.63,1289.37 1086,1242 1086,973.84 P2.9
X0D36: P1.8 U1.1 | length 365.9
  Top Layer w6: P1.8 110.63,1407.48 U1.1
X0D37: P1.9 U1.64 | length 453.4
  Top Layer w6: P1.9 131.89,1486.22 U1.64
X0D38: P1.7 U1.2 | length 356.4
  Top Layer w6: P1.7 212.3,1359.06 241.04,1387.8 U1.2
X0D39: P1.6 U1.4 | length 387.8
  Top Layer w6: P1.6 167.06,1259.06 264,1356 354,1356 361.57,1348.43 U1.4
XL_DN0: J2.14 U1.6 | length 990
  Top Layer w6: v1(312,1308) 313.06,1309.06 U1.6
  Bottom Layer w6: v1(312,1308) 312,1584 372,1644 630,1644 732,1746 732,1813.1 J2.14
XL_DN1: J2.18 U1.5 | length 1088.1
  Top Layer w6: v1(342,1328.87) 343.5,1327.37 402.17,1327.37 U1.5
  Bottom Layer w6: v1(342,1328.87) 342,1572 396,1626 642,1626 732,1716 798,1716 828,1746 828,1788 852,1812 924,1812 973.02,1861.02 J2.18
XL_UP0: J2.10 R3.2 | length 413
  Top Layer w6: R3.2 353.33,1664.36 341.33,1676.36 341.33,1677.03 336,1682.36 336,1800 354,1818 536.9,1818 J2.10
XL_UP1: J2.6 R4.2 | length 232.3
  Top Layer w6: R4.2 296.28,1664.36 308.28,1676.36 308.28,1677.36 324,1693.08 324,1805.1 J2.6
pads on no net: FM1.1 FM2.1 FM3.1 J1.A8 J1.B8 J1.None J2.1 J2.2 J2.3 J2.11 J2.17 J2.19 P1.10 U1.21 U1.33

## Polygon pours and split planes (outlines as drawn)
GND on Top Layer "GND_L01_P004" (solid, remove dead copper, pour order 4): 19.68,19.68 19.68,1889.76 1240.16,1889.76 1240.16,19.68
NetFB2_1 on Top Layer "NETFB2_1_L01_P002" (solid, remove dead copper, pour order 2): 120,366 120,19.68 558,19.68 558,84 606,84 606,150 558,150 558,366
GND on Bottom Layer "GND_L04_P005" (solid, remove dead copper, pour order 5): 19.68,19.68 19.68,1889.76 1240.16,1889.76 1240.16,19.68
NetFB2_1 on Bottom Layer "NETFB2_1_L04_P003" (solid, remove dead copper, pour order 3): 120,366 120,19.68 558,19.68 558,366
GND on Ground Layer (split plane): 1239.75,20.1 20.1,20.1 20.1,1889.35 1239.75,1889.35
3V3A on Power Layer (split plane): 1239.75,20.1 840.05,20.1 840.05,342 839.85,343.57 839.24,345.03 838.28,346.28 837.03,347.24 835.57,347.85 834,348.05 744,348.05 742.43,347.85 740.97,347.24 739.72,346.28 738.76,345.03 738.15,343.57 737.95,342 737.95,216.05 582.05,216.05 582.05,396 581.85,397.57 581.24,399.03 580.28,400.28 579.03,401.24 577.57,401.85 576,402.05 132.05,402.05 132.05,810 131.85,811.57 131.24,813.03 130.28,814.28 129.03,815.24 127.57,815.85 126,816.05 20.1,816.05 20.1,1889.35 1239.75,1889.35
5V on Power Layer (split plane): 119.95,342 120.15,340.43 120.76,338.97 121.72,337.72 122.97,336.76 124.43,336.15 126,335.95 515.95,335.95 515.95,210 516.15,208.43 516.76,206.97 517.72,205.72 518.97,204.76 520.43,204.15 522,203.95 744,203.95 745.57,204.15 747.03,204.76 748.28,205.72 749.24,206.97 749.85,208.43 750.05,210 750.05,335.95 827.95,335.95 827.95,20.1 20.1,20.1 20.1,803.95 119.95,803.95
NetFB1_1 on Power Layer (split plane): 569.95,216.05 528.05,216.05 528.05,342 527.85,343.57 527.24,345.03 526.28,346.28 525.03,347.24 523.57,347.85 522,348.05 132.05,348.05 132.05,389.95 569.95,389.95
1V0A on Power Layer (split plane): 983.95,1082.51 807.49,906.05 726,906.05 724.43,905.85 722.97,905.24 721.72,904.28 720.76,903.03 720.15,901.57 719.95,900 719.95,804 720.15,802.43 720.76,800.97 721.72,799.72 839.95,681.49 839.95,576.05 792.05,576.05 792.05,654 791.85,655.57 791.24,657.03 790.28,658.28 672.05,776.51 672.05,900 672.05,953.95 774,953.95 775.57,954.15 777.03,954.76 778.28,955.72 928.28,1105.72 929.24,1106.97 929.85,1108.43 930.05,1110 930.05,1356 929.85,1357.57 929.24,1359.03 928.28,1360.28 927.03,1361.24 925.57,1361.85 924,1362.05 534,1362.05 532.43,1361.85 530.97,1361.24 529.72,1360.28 387.49,1218.05 282.05,1218.05 282.05,1259.95 360,1259.95 361.57,1260.15 363.03,1260.76 364.28,1261.72 506.51,1403.95 846,1403.95 847.57,1404.15 849.03,1404.76 850.28,1405.72 902.51,1457.95 983.95,1457.95

## Other copper
Top Layer:
  pour cut-out: 432.86,1413.37 476.25,1456.76 783.37,1456.76 826.87,1413.26 826.87,1106.2 783.45,1062.78 476.39,1062.78 476.39,1063.01 433,1106.4
  pour cut-out: 1182,1830 ccw(c1182,1788) 1140,1788 ccw(c1182,1788) 1182,1746 ccw(c1182,1788) 1224,1788 ccw(c1182,1788)
  pour cut-out: 78,1872 ccw(c78,1830) 36,1830 ccw(c78,1830) 78,1788 ccw(c78,1830) 120,1830 ccw(c78,1830)
  pour cut-out: 1092,114 ccw(c1092,72) 1050,72 ccw(c1092,72) 1092,30 ccw(c1092,72) 1134,72 ccw(c1092,72)
  region net 5V: 742.52,338.58 741.85,312.78 775.85,312.64 775.85,277.78 798.96,277.78 798.96,312.78 832.96,312.78 832.28,338.58 801.57,338.58 798.96,312.78 775.85,312.78 773.23,338.58
  region net 1V0A: 832.96,553.37 832.28,527.56 801.57,527.56 798.96,553.37
  region net 3V3A: 741.85,553.37 742.52,527.56 773.23,527.56 775.85,553.37
Power Layer (plane layer: these items are gaps in the copper):
  lines w12: 0,810 126,810 126,342 192,342 522,342 522,210 576,210 ; 126,396 576,396 576,210 ; 834,0 834,342 744,342 744,210 576,210 ; 276,1212 276,1266 360,1266 504,1410 846,1410 900,1464 990,1464 990,1080 810,900 726,900 726,804 846,684 846,570 786,570 786,654 666,774 666,900 666,960 774,960 924,1110 924,1356 534,1356 390,1212 276,1212

## Silkscreen, mask and mechanical layers (free items; w line width, h text height)
Mechanical 1:
  the board outline again, w1
Drill Drawing:
  circle w5.91: c1472.4,729.01 r32.81
  lines w3.94: 1381.97,356.63 6610.86,356.63 ; 1381.97,1094.82 6610.86,1094.82 ; 1911.57,209 1911.57,1242.46 ; 2484.25,209 2484.25,1242.46 ; 3182.09,209 3182.09,1242.46 ; 3667.4,209 3667.4,1242.46 ; 4377.05,209 4377.05,1242.46 ; 5845.11,209 5845.11,1242.46 ; 1381.97,209 6610.86,209 6610.86,1242.46 1381.97,1242.46 1381.97,209
  lines w5.91: 1439.59,400.93 1472.4,417.33 1505.2,400.93 1488.8,433.73 1505.2,466.54 1472.4,450.14 1439.59,466.54 1455.99,433.73 1439.59,400.93 ; 1439.59,548.56 1505.2,548.56 1505.2,614.18 1439.59,614.18 1439.59,548.56 ; 1439.59,860.24 1455.99,860.24 1472.4,843.84 1488.8,860.24 1505.2,860.24 1488.8,876.65 1505.2,893.05 1488.8,893.05 1472.4,909.46 1455.99,893.05 1439.59,893.05 1455.99,876.65 1439.59,860.24 ; 1439.59,1057.09 1505.2,1057.09 1472.4,991.48 1439.59,1057.09
  text "Symbol" at 1470.55,1139.11 h70.87
  text "Count" at 1955.86,1139.11 h70.87
  text "Hole Size" at 2528.54,1139.11 h70.87
  text "Plated" at 3226.38,1139.11 h70.87
  text "Hole Type" at 3711.69,1139.11 h70.87
  text "Drill Layer Pair" at 4421.34,1139.11 h70.87
  text "Pad Shape" at 5889.4,1139.11 h70.87
  text "2" at 1955.86,991.48 h59.06
  text "0.600mm" at 2528.54,991.48 h59.06
  text "PTH" at 3226.38,991.48 h59.06
  text "Slot" at 3711.69,991.48 h59.06
  text "Top Layer - Bottom Layer" at 4421.34,991.48 h59.06
  text "Rounded" at 5889.4,991.48 h59.06
  text "2" at 1955.86,843.84 h59.06
  text "0.600mm" at 2528.54,843.84 h59.06
  text "PTH" at 3226.38,843.84 h59.06
  text "Slot" at 3711.69,843.84 h59.06
  text "Top Layer - Bottom Layer" at 4421.34,843.84 h59.06
  text "Rounded" at 5889.4,843.84 h59.06
  text "2" at 1955.86,696.2 h59.06
  text "0.650mm" at 2528.54,696.2 h59.06
  text "NPTH" at 3226.38,696.2 h59.06
  text "Round" at 3711.69,696.2 h59.06
  text "Top Layer - Bottom Layer" at 4421.34,696.2 h59.06
  text "Rounded" at 5889.4,696.2 h59.06
  text "47" at 1955.86,548.56 h59.06
  text "0.900mm" at 2528.54,548.56 h59.06
  text "PTH" at 3226.38,548.56 h59.06
  text "Round" at 3711.69,548.56 h59.06
  text "Top Layer - Bottom Layer" at 4421.34,548.56 h59.06
  text "(Mixed)" at 5889.4,548.56 h59.06
  text "130" at 1955.86,400.93 h59.06
  text "0.300mm" at 2528.54,400.93 h59.06
  text "PTH" at 3226.38,400.93 h59.06
  text "Round" at 3711.69,400.93 h59.06
  text "Top Layer - Bottom Layer" at 4421.34,400.93 h59.06
  text "Rounded" at 5889.4,400.93 h59.06
  text "183 Total" at 1955.86,253.29 h59.06
  text "Slot definitions :" at 1470.55,118.47 h59.06
  text "Routed Path Length" at 2475.95,118.47 h59.06
  text "= Calculated from tool start centre position to tool end centre position." at 3550.23,118.47 h59.06
  text "Hole Length" at 2475.95,27.95 h59.06
  text "= Routed Path Length + Tool Size = Slot length as defined in the PCB layout" at 3146.82,27.95 h59.06
Mechanical 17:
  lines w3.94: 1380,1483.48 5474.49,1483.48 ; 1380,1640.96 5474.49,1640.96 ; 1380,1798.44 5474.49,1798.44 ; 1380,1955.92 5474.49,1955.92 ; 2206.77,1326 2206.77,2231.51 ; 3033.54,1326 3033.54,2231.51 ; 3742.2,1326 3742.2,2231.51 ; 4254.02,1326 4254.02,2231.51 ; 4883.94,1326 4883.94,2231.51 ; 1380,2231.51 1380,2625.21 3269.76,2625.21 5474.49,2625.21 5474.49,2231.51 ; 1380,2231.51 5474.49,2231.51 ; 1380,2231.51 1380,1326 5474.49,1326 5474.49,2231.51
  text "IMPEDANCE DETAIL" at 2895.75,2448.05 h98.43
  text "IMPEDANCE TOLERANCE IS 10%" at 2876.06,2310.25 h59.06
  text "SIGNAL LAYER" at 1458.74,2113.4 h59.06
  text "REF PLANE" at 2285.51,2113.4 h59.06
  text "TYPE" at 3112.28,2113.4 h59.06
  text "TRACE" at 3820.94,2113.4 h59.06
  text "TRACE" at 4332.76,2113.4 h59.06
  text "IMPEDANCE" at 4962.68,2113.4 h59.06
  text "LAYER(S)" at 2285.51,1995.29 h59.06
  text "WIDTH" at 3820.94,1995.29 h59.06
  text "SEPARATION" at 4332.76,1995.29 h59.06
  text "(OHMS)" at 4962.68,1995.29 h59.06
  text "Top Layer" at 1458.74,1837.81 h59.06
  text "Ground Layer" at 2285.51,1837.81 h59.06
  text "DIFFERENTIAL" at 3112.28,1837.81 h59.06
  text "8.1mil" at 3820.94,1837.81 h59.06
  text "5mil" at 4332.76,1837.81 h59.06
  text "90" at 4962.68,1837.81 h59.06
  text "Buttom Layer" at 1458.74,1680.33 h59.06
  text "Ground Layer" at 2285.51,1680.33 h59.06
  text "DIFFERENTIAL" at 3112.28,1680.33 h59.06
  text "8.1mil" at 3820.94,1680.33 h59.06
  text "5mil" at 4332.76,1680.33 h59.06
  text "90" at 4962.68,1680.33 h59.06
  text "Top Layer" at 1458.74,1522.85 h59.06
  text "Ground Layer" at 2285.51,1522.85 h59.06
  text "SINGLE ENDED" at 3112.28,1522.85 h59.06
  text "11.55mil" at 3820.94,1522.85 h59.06
  text "NA" at 4332.76,1522.85 h59.06
  text "50" at 4962.68,1522.85 h59.06
  text "Buttom Layer" at 1458.74,1365.37 h59.06
  text "Ground Layer" at 2285.51,1365.37 h59.06
  text "SINGLE ENDED" at 3112.28,1365.37 h59.06
  text "11.55mil" at 3820.94,1365.37 h59.06
  text "NA" at 4332.76,1365.37 h59.06
  text "50" at 4962.68,1365.37 h59.06